# Altium PCB PCBVerstuur.pcbdoc (part 2 of 2)
Units mil, origin at the board's own origin, x right, y up, seen from the top; angles counter-clockwise.
Board outline 6000 x 4000 mil, 2 copper layers (Top Layer, Bottom Layer); 76 components, 71 nets, 294 pads, 53 vias.
Unrouted connection lines stored in the file: 2.
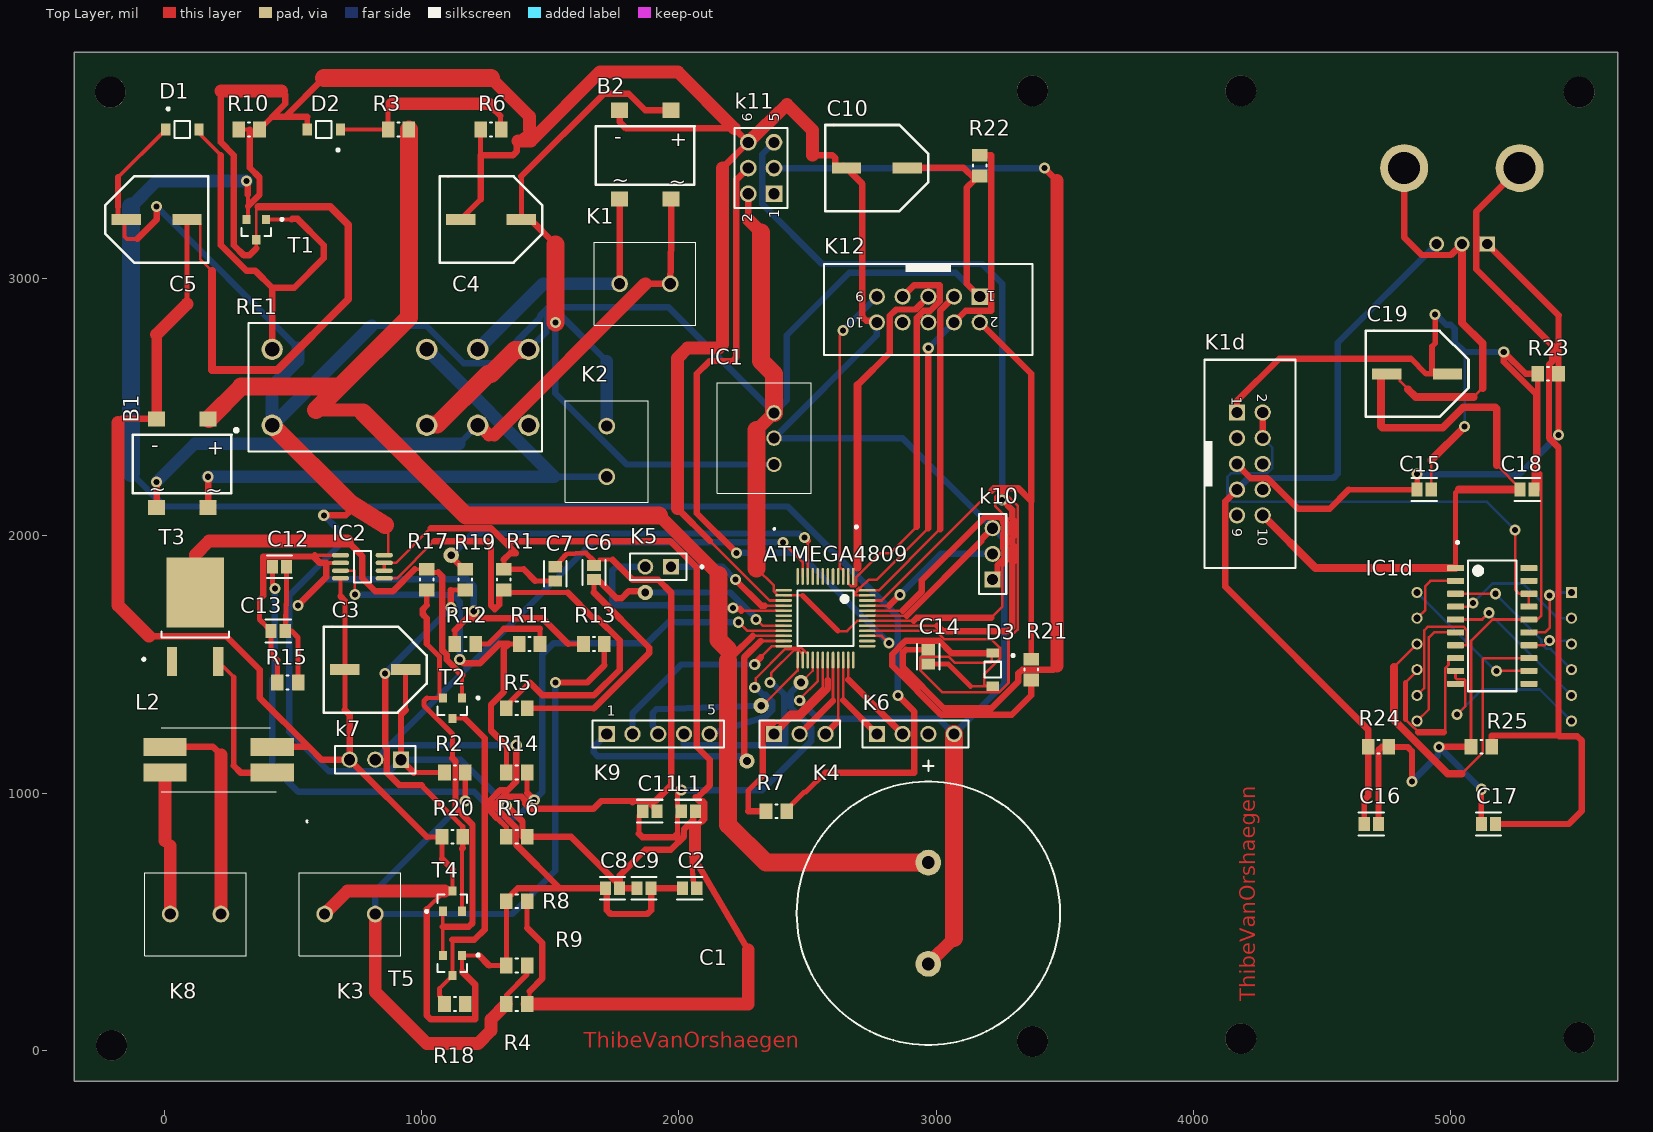
[diagram p0: Top Layer view]

## Via types
v1: diameter 43.31, hole 23.62, Top Layer to Bottom Layer, 53 vias

## Nets (pads, with @x,y where several pads share a name; then routed paths per layer and width w, separated by ;. In a path a pad name is that pad's centre, name@x,y a point inside that pad or via, vN(x,y) a via of type N, cw(c..) or ccw(c..) an arc to the next point about the centre after c; other vN are vias at no path point) (continued)
NetC17_2: (continued)
  Top Layer w25: ENC1.1 5100,3261.18 5100,3037 5394.94,2742.06 5394.94,2717 ; 5460,880 5511,931 5511,1203.29 5493.14,1221.14
NetD1_2: D1.2 RE1.A2 T1.1 | length 1537.5
  Top Layer w15: D1.2@139.78,3560.22 220,3480 ; T1.1 495,3230
  Top Layer w25: 220,3480 220,3130 320,3030 354.21,3030 419.21,2965 ; RE1.A2 419.21,2965 ; 495,3230 497.14,3232.14 517.86,3232.14 620,3130 620,3080 505,2965 419.21,2965
NetD2_1: D2.1 R3.1 R6.2 | length 782
  Top Layer w15: D2.1 R3.1
  Top Layer w20: R3.1 870,3665.59 ; R6.2@1306.22,3584.14 1306.22,3633.37
  Top Layer w24.61: 870,3665.59 884.41,3680 ; 1259.59,3680 1274,3665.59
  Top Layer w25: 1274,3665.59 1306.22,3633.37
  Top Layer w50: 884.41,3680 1259.59,3680
NetIC1d_2: IC1d.2 LD1.11 | length 264.1
  Top Layer w10: LD1.11 4902,1712 4902,1805 4922,1825 IC1d.2
NetIC1d_3: IC1d.3 LD1.4 | length 582.1
  Top Layer w10: IC1d.3 v1(5175,1775)
  Bottom Layer w10: v1(5175,1775) 5353.82,1596.18 5353.82,1580 5372.73,1561.09 5388.91,1561.09 LD1.4
NetIC1d_4: IC1d.4 LD1.2 | length 543.6
  Top Layer w10: IC1d.4 5074,1725 v1(5088,1739)
  Bottom Layer w10: v1(5088,1739) 5164,1815 5281.53,1815 5416.53,1680 LD1.2
NetIC1d_5: IC1d.5 LD1.5 | length 594.2
  Top Layer w10: IC1d.5 5123,1675 v1(5149,1701)
  Bottom Layer w10: v1(5149,1701) LD1.5
NetIC1d_6: IC1d.6 LD1.7 | length 455.9
  Top Layer w10: LD1.7 4916.07,1326.07 4916.07,1605 4936.07,1625 IC1d.6
NetIC1d_7: IC1d.7 LD1.8 | length 542.3
  Top Layer w10: LD1.8 4898,1408 4898,1632.5 4912.5,1647 5050,1647 5063,1634 5063,1576 5062,1575 IC1d.7
NetIC1d_8: IC1d.8 LD1.9 | length 700.7
  Top Layer w10: 4825,1286.95 4843.09,1268.86 4875.15,1236.8 ; 4825,1430 4870,1475 LD1.9 ; 4974.14,1236.8 4980,1242.66 4980,1485.98 4992.21,1498.19 4992.21,1518.19 4999.02,1525 IC1d.8
  Top Layer w20: 4825,1286.95 4825,1430
  Top Layer w25: 4875.15,1236.8 4974.14,1236.8
NetIC1d_9: IC1d.9 LD1.6 | length 751.6
  Top Layer w10: IC1d.9 5019.57,1448.19 5025.69,1442.07 5053.05,1442.07 5057.3,1437.81 5057.3,1337.3 v1(5025,1305)
  Bottom Layer w10: v1(5025,1305) 5123,1403 5347,1403 LD1.6
NetIC1d_12: IC1d.12 LD1.12 | length 561.3
  Top Layer w10: v1(5179,1475) IC1d.12
  Bottom Layer w10: LD1.12 5175,1475 v1(5179,1475)
NetIC1d_13: IC1d.13 LD1.10 | length 1343.1
  Top Layer w10: 4780,1490 LD1.10 ; 5043.5,1075 5125,1156.5 5125,1519.14 5130.86,1525 IC1d.13
  Top Layer w30: 4780,1490 4780,1285 4990,1075 5043.5,1075
NetIC1d_14: IC1d.14 LD1.3 | length 177.8
  Top Layer w10: IC1d.14 5367,1575 v1(5385,1593)
  Bottom Layer w10: v1(5385,1593) 5457,1593 LD1.3
NetIC1d_15: IC1d.15 LD1.1 | length 303.3
  Top Layer w10: IC1d.15 5367.5,1625 5385,1642.5 v1(5385,1769)
  Bottom Layer w10: v1(5385,1769) 5396,1780 LD1.1
NetIC1d_17: IC1d.17 IC1d.18 K1d.2 K1d.4 | length 2013.2
  Top Layer w10: v1(5251,2023) 5251,1792.5 5268.5,1775 IC1d.18 IC1d.17
  Top Layer w25: K1d.4 K1d.2
  Bottom Layer w10: K1d.4 4307,2343 4307,2262.5 4287.5,2243 4146,2243 4133,2230 4133,2149 4150,2132 5142,2132 v1(5251,2023)
NetIC2_1: IC2.1 R1.1 R5.2 | length 2018.4
  Top Layer w10: IC2.1 904.02,1835 1049.02,1980
  Top Layer w20: R1.1 1329.65,1780 1568,1780 ; R5.2 1344.25,1344.61 1344.25,1354.25 1420,1430
  Top Layer w25: 1049.02,1980 1255.36,1980 1270,1965.36 1270,1730 1284.64,1715.36 1301.99,1732.7 1301.99,1777.54 R1.1@1314.09,1789.65 ; 1420,1430 1470,1380 1670,1380 1770,1480 1770,1594.29 1684.29,1680 1668,1680 1568,1780
NetIC2_7: IC2.7 R11.1 R14.2 | length 1613.4
  Top Layer w10: IC2.7 741,1865 v1(741,1772)
  Top Layer w20: R14.2 1329.65,1184 ; 1338,1580 R11.1
  Top Layer w25: v1(1148.41,1519.59) 1163,1505 1227.29,1505 1302.29,1580 1338,1580 1320,1562 1320,1393.51 1270,1343.51 1270,1243.65 1329.65,1184
  Bottom Layer w25: v1(741,1772) 1120,1772 1148.41,1743.59 v1(1148.41,1519.59)
NetK2_1: K2.1 RE1.12 RE1.24 | length 1238.1
  Top Layer w70: RE1.12 1022.43,2432.43 1060.96,2432.43 1258.53,2630 1270,2630 1362.85,2722.85 1414.42,2722.85 RE1.24
  Bottom Layer w25: RE1.24 1485.59,2794.02 1485.59,2844.25 1505.75,2864.41 1534.25,2864.41 1720,2678.66
  Bottom Layer w50: K2.1 1720,2678.66
NetK3_1: K3.1 R2.1 R4.2 R9.2 R13.2 | length 3665.7
  Top Layer w20: v1(1170,970) R2.1 ; R4.2 1329.65,214 1410.35,294.71 R9.2 ; 1710.35,1496.35 R13.2
  Top Layer w25: v1(1520,1430) 1644,1430 1710.35,1496.35
  Top Layer w50: K3.1 820,227 1020,27 1220,27 1270,77 1270,120.35 R4.2
  Bottom Layer w25: v1(1170,970) 820,620 K3.1 1352,530 1520,698 v1(1520,1430)
NetK8_1: K8.1 L2.3 | length 849.6
  Top Layer w25: L2.3 189,1180 220,1149
  Top Layer w50: K8.1 220,1149
NetK8_2: K8.2 L2.4 | length 558.6
  Top Layer w25: 2.28,814.87 23.15,794
  Top Layer w50: 2.28,814.87 L2.4 ; K8.2 23.15,794
NetL2_1: L2.1 T3.3 | length 592
  Top Layer w15: T3.3 270,1452.05
  Top Layer w20: 270,1106 270,1452.05
  Top Layer w25: 270,1106 296,1080 L2.1
NetR7_2: R7.2 R10.2 T1.2 | length 6466.1
  Top Layer w15: T1.2 325.22,3235.22 325.22,3281.71 325.22,3328.21 323.5,3326.5
  Top Layer w15.75: R10.2 332.64,3580
  Top Layer w20: R7.2 2420,935.91 2489.09,1005 2495,1005 2570,1080
  Top Layer w25: v1(320,3380) 323.5,3376.5 323.5,3326.5 ; 325.22,3281.71 370,3326.5 370,3393.42 332.64,3430.78 332.64,3580 ; 2570,1080 2915,1080 2915,1317 v1(2852,1380)
  Bottom Layer w25: -130,2245 0.59,2114.41 2423.59,2114.41 2852,1686 v1(2852,1380)
  Bottom Layer w50: -130,3280 -30,3380 v1(320,3380)
  Bottom Layer w70: -130,2245 -130,3280
NetR11_2: R11.2 R12.1 | length 334.4
  Top Layer w20: R12.1 1260.44,1580 1320.09,1639.65 ; R11.2 1460.35,1639.65
  Top Layer w25: 1320.09,1639.65 1460.35,1639.65
NetR17_1: R17.1 T2.2 T4.1 T5.2 | length 1755
  Top Layer w15: 1020.63,1369.37 T2.2 ; T2.2@1070,1380 1070,1480 ; T5.2 1082.6,480 T4.1
  Top Layer w20: 1020,1580 1070,1530 1070,1480 ; 1020,1730 R17.1 ; 1020.63,1369.37 1008.91,1357.65 1008.91,1341.09 1120,1230 1120,1136
  Top Layer w25: 1020,1580 1020,1680 1005.36,1694.64 1005.36,1715.36 1020,1730 ; 1082.6,480 1170,480 1170.16,480.16 1183.36,480.16 1198,494.8 1198,877 1132,943 1132,1124 1120,1136
NetR18_1: R18.1 T2.3 T5.3 | length 1321.1
  Top Layer w15: 1070,240.63 T5.3 1120,430
  Top Layer w15.75: T2.3 1168,1290.63
  Top Layer w20: 1070,240.63 1070,212.23 1074.69,207.54 1074.69,194.61 R18.1
  Top Layer w25: 1120,430 1205.36,430 1245.08,469.73 1245.08,1213.55 1168,1290.63
NetR19_2: R19.2 R20.2 T4.2 | length 1587.3
  Top Layer w15: T4.2 1157.4,784.02
  Top Layer w20: 1000,1030 1160.35,869.65 R20.2 1160.35,786.97 ; 1114,1789.65 R19.2
  Top Layer w24.61: 1157.4,784.02 1160.35,786.97
  Top Layer w25: v1(858,1465) 858,1181 865,1174 865,1080 915,1030 1000,1030 ; v1(1114,1721) 1114,1789.65
  Bottom Layer w25: v1(858,1465) v1(1114,1721)
PC0: ATMEGA4809.10 pad.7 R19.1 | length 1641.7
  Top Layer w10: ATMEGA4809.10 v1@2501.1,1980.9
  Top Layer w25: pad.7@1125,1925.71 1125,1909.45 1151.99,1882.46 1157.89,1882.46 R19.1 ; v1(2488,1994) v1@2501.1,1980.9
  Bottom Layer w25: pad.7@1120,1930 1199.41,2009.41 2467.64,2009.41 2483.05,1994 v1(2488,1994)
PD0: ATMEGA4809.20 C6.1 pad.9 R5.1 | length 1761.4
  Top Layer w10: v1(2300,1675) 2302.78,1675 2327.31,1650.47 ATMEGA4809.20
  Top Layer w20: R5.1 1670,1330 ; 1670,1780 C6.1
  Top Layer w25: 1670,1330 1884.64,1544.64 1884.64,1565.36 1670,1780 ; C6.1@1685.67,1830 1757.48,1758.19 1778.19,1758.19 1804.78,1784.78 pad.9@1874.78,1784.78
  Bottom Layer w25: pad.9 2199.79,1780 2300,1679.79 v1(2300,1675)
PD1: ATMEGA4809.21 C12.1 R14.1 | length 3612.1
  Top Layer w10: v1(2232.79,1664.41) 2266.41,1630.79 ATMEGA4809.21
  Top Layer w20: C12.1 420,1811.31 430,1801.31 v1(430,1795) ; 1410.35,1000.65 R14.1
  Top Layer w25: 1410.35,1000.65 v1(1438,973)
  Bottom Layer w25: v1(430,1795) 430,1452.52 420,1442.52 420,1105 520,1005 1204,1005 1302,907 1372,907 v1(1438,973) 1470,1005 1470,1539.59 1513.85,1583.44 1877.88,1583.44 1958.85,1664.41 v1(2232.79,1664.41)
PD2: ATMEGA4809.22 B1.1 C1.2 R3.2 | length 5713.9
  Top Layer w10: 2287.1,1611.1 ATMEGA4809.22
  Top Layer w25: B1.1 B1.1@173.94,2455 ; 763,2489 772,2480 ; 2192,1516 2213,1537 2287.1,1611.1
  Top Layer w50: 590,2489 763,2489 ; 1923,2080 2154.44,1848.56 ; 2192,1516 2192,1558
  Top Layer w70: B1.1@173.94,2455 298.94,2580 681,2580 ; 590,2489 681,2580 ; 772,2480 1172,2080 1923,2080 ; R3.2 950.71,2849.71 681,2580 ; 2154.44,1848.56 2154.44,1595.56 2192,1558 ; 2192,1516 2192,877 2339,730 C1.2
PE0: ATMEGA4809.30 R7.1 | length 835.7
  Top Layer w10: 2369.25,1274.25 2389.14,1274.25 2430.39,1315.5 2463.56,1315.5 2560.16,1412.11 ATMEGA4809.30
  Top Layer w20: 2270,930 2270,1010 2327,1067
  Top Layer w25: 2270,930 R7.1 ; 2327,1067 2327,1185 2325,1187 2325,1274.25 2369.25,1274.25
Vin: R17.2 T2.1 T3.2 | length 1795.2
  Top Layer w15: 974,1870.35 R17.2 ; T2.1 1157.4,1458.6
  Top Layer w20: R17.2@1032.11,1858.25 1064.95,1858.25
  Top Layer w25: T3.2 120,1926 ; 711.61,1980 770,1921.61 770,1835 820,1785 888.65,1785 974,1870.35 ; 1064.95,1858.25 1079.59,1843.6 1079.59,1556.12 1097.71,1538.01 1097.71,1518.29 1157.4,1458.6
  Top Layer w50: 120,1926 174,1980 711.61,1980
pads on no net: ATMEGA4809.4 ATMEGA4809.5 ATMEGA4809.6 ATMEGA4809.7 ATMEGA4809.8 ATMEGA4809.9 ATMEGA4809.12 ATMEGA4809.13 ATMEGA4809.18 ATMEGA4809.19 ATMEGA4809.36 ATMEGA4809.37 ATMEGA4809.38 IC1d.10 IC1d.11 IC1d.19 IC1d.20 K1d.3 K1d.6 K1d.8 K1d.9 K6.3 k11.1 K12.6 K12.8 R18.2 RE1.14 T3.1

## Other copper
Top Layer:
  text "ThibeVanOrshaegen" at 4240.01,190 h60 r90
  text "ThibeVanOrshaegen" at 1630,9.99 h60

## Text inside footprints (layer, text, board x,y; h text height)
B1: Top Overlay "+" at 165,2315 h60; Top Overlay "-" at -50,2325.01 h60; Top Overlay "~" at 160,2150.02 h60; Top Overlay "~" at -60,2155.02 h60
B2: Top Overlay "+" at 1965,3515 h60; Top Overlay "-" at 1750,3525.01 h60; Top Overlay "~" at 1960,3350.02 h60; Top Overlay "~" at 1740,3355.02 h60
K1d: Top Overlay "1" at 4149.13,2541.42 h40 r270; Top Overlay "2" at 4249.13,2553.23 h40 r270; Top Overlay "10" at 4251.5,2030.39 h40 r270; Top Overlay "9" at 4151.5,2030.39 h40 r270
K9: Top Overlay "5" at 2110,1305 h40; Top Overlay "1" at 1720,1300 h40
k11: Top Overlay "6" at 2285,3610 h40 r90; Top Overlay "5" at 2390,3610 h40 r90; Top Overlay "2" at 2285,3220 h40 r90; Top Overlay "1" at 2390,3235 h40 r90
K12: Top Overlay "9" at 2720.39,2948.5 h40 r180; Top Overlay "10" at 2720.39,2848.5 h40 r180; Top Overlay "2" at 3243.23,2850.87 h40 r180; Top Overlay "1" at 3231.42,2950.87 h40 r180